# EAGLE board Arduino_Shield_3_4_19_REV2 (EAGLE 9.3.1)
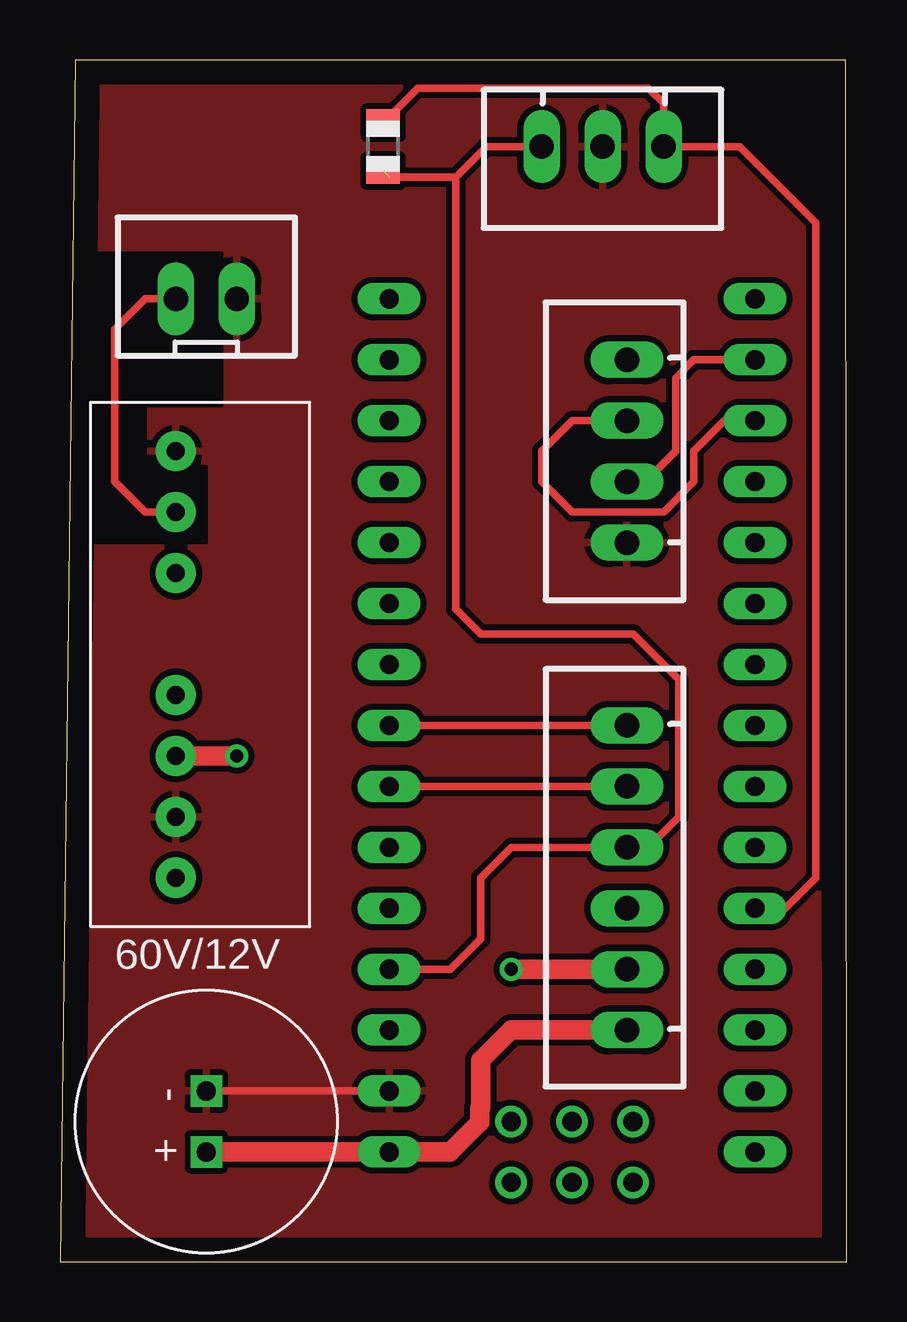
[diagram p0: board, top side]
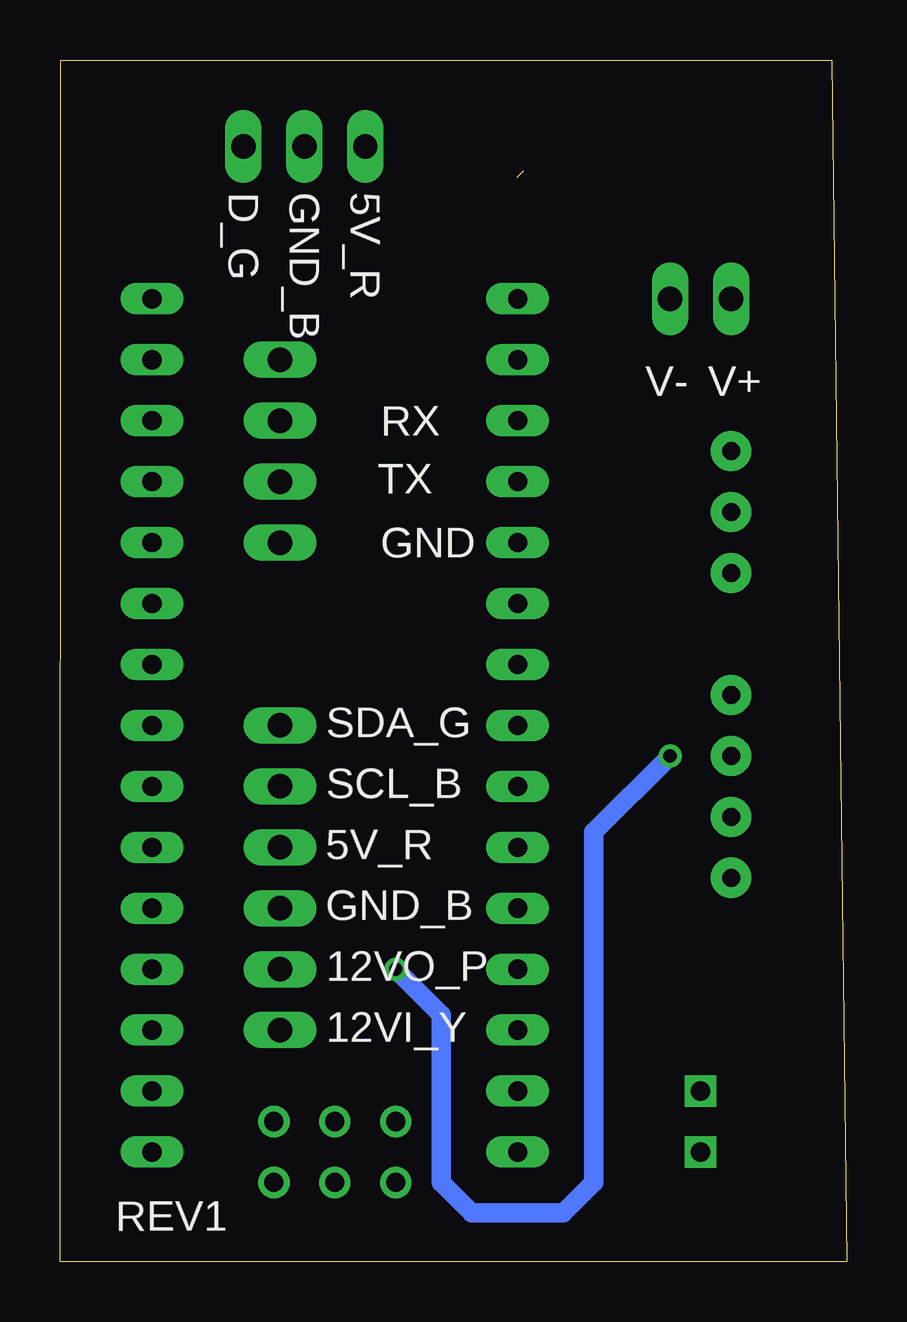
[diagram p1: board, bottom side, seen from below]

Size 32.79 x 50.09 mm. Coordinates in mm from the lower left corner, seen from the top.
Outline: 0,0 32.79,0 32.75,50.09 0.63,50.09 0,0
Copper layers (1*16): Top 0.035mm / dielectric 1.5mm / Bottom 0.035mm
Design rules "default": minimum track width 6mil, minimum drill 0.35mm, track to track 6mil, track to pad 6mil, pad to pad 6mil, via to via 6mil, smd to smd 6mil, copper to edge 40mil, drill to drill 6mil, minimum pad ring 10mil, minimum via ring 8mil, stop-mask expansion 4mil, vias tented up to drill 0mil, thermal gap 10mil
Net classes: 0 default: width 0.305 mm, clearance 0.254 mm; 1 POWER: width 0.762 mm, clearance 0.762 mm

## Footprints (pad centres in the part's own frame; a part is rotated, then mirrored left to right if it is on the bottom)
R0805 = smd 1.1 x 1.4: 1 -1,0; 2 1,0
NANO = drill 0.8 long: 3.3V -10.16,24.13; 5V -10.16,-1.27; A0 -10.16,19.05; A1 -10.16,16.51; A2 -10.16,13.97; A3 -10.16,11.43; A4 -10.16,8.89; A5 -10.16,6.35; A6 -10.16,3.81; A7 -10.16,1.27; AREF -10.16,21.59; D2 5.08,1.27; D3 5.08,3.81; D4 5.08,6.35; D5 5.08,8.89; D6 5.08,11.43; D7 5.08,13.97; D8 5.08,16.51; D9 5.08,19.05; D10 5.08,21.59; D11 5.08,24.13; D12 5.08,26.67; D13 -10.16,26.67; GND -10.16,-6.35; GND1 5.08,-1.27; RAW -10.16,-8.89; RST -10.16,-3.81; RST1 5.08,-3.81; RX1 5.08,-6.35; TX0 5.08,-8.89 | drill 0.8: ICSP1 -5.08,-10.16; ICSP2 -5.08,-7.62; ICSP3 -2.54,-10.16; ICSP4 -2.54,-7.62; ICSP5 0,-10.16; ICSP6 0,-7.62
SPBW06G-12 = drill 0.75 pad 1.676: +V_IN 2.54,0; +V_OUT 12.7,0; -V_IN 0,0; -V_OUT 15.24,0; N.C 10.16,0; N.C@8 17.78,0; R.C 5.08,0
THROUGHHOLE_CAP = drill 0.8 square: + 0,0; - 2.54,0
JST-XH-04-PACKAGE-LONG-PAD = drill 1.016 long: 1 -3.81,0; 2 -1.27,0; 3 1.27,0; 4 3.81,0
JST-XH-06-PACKAGE-LONG-PAD = drill 1.016 long: 1 -6.35,0; 2 -3.81,0; 3 -1.27,0; 4 1.27,0; 5 3.81,0; 6 6.35,0
JST-XH-02-PACKAGE-LONG-PAD = drill 1.016 long: 1 -1.27,0; 2 1.27,0
JST-XH-03-PACKAGE-LONG-PAD = drill 1.016 long: 1 -2.54,0; 2 0,0; 3 2.54,0

## Placement (x,y rotation side)
R1  10k  [R0805]  13.46,46.48 270 top
U$1  NANO  [NANO]  23.88,13.46 0 top
U$2  SPBW06G-12  [SPBW06G-12]  4.83,33.78 270 top
U$3  THROUGHHOLE_CAP  [THROUGHHOLE_CAP]  6.1,4.57 90 top
X1  JST_XH_04  [JST-XH-04-PACKAGE-LONG-PAD]  23.62,33.78 90 top
X2  JST_XH_06  [JST-XH-06-PACKAGE-LONG-PAD]  23.62,16 90 top
X4  JST_XH_02  [JST-XH-02-PACKAGE-LONG-PAD]  6.1,40.13 0 top
X5  JST_XH_03  [JST-XH-03-PACKAGE-LONG-PAD]  22.61,46.48 180 top

## Library data of the parts
R1 = adafruit
U$1 = Arduino-clone
U$2 U$3 = Bryan's_Library
X1 X2 X4 X5 = Rembrandt Electronics - JST XH Connectors v1-0

## Nets
5V_VCC_RED: R1.2 U$1.5V X2.4 X5.3
12V_IN_YELLOW: U$1.RAW U$3.+ X2.1
12V_OUT_PURPLE: U$2.+V_OUT X2.2
GND: U$1.GND U$2.-V_IN U$2.-V_OUT U$3.- X1.1 X4.2 X5.2
GND_BLACK: X2.3
LCD_SCL_BLUE: U$1.A5 X2.5
LCD_SDA_GREEN: U$1.A4 X2.6
N$4: R1.1 U$1.D2 X5.1
N.C: X1.4
RX: U$1.D10 X1.3
TX: U$1.D11 X1.2
V_BAT: U$2.+V_IN X4.1

## Tracks (layer width: path | path; a pad name or v marks a point on that pad's centre or on a via)
5V_VCC_RED  (1 unrouted)
  Top 0.305: U$1.5V 16.26,12.19 17.53,13.46 17.53,16 18.8,17.27 X2.4 24.51,17.27 25.78,18.54 25.78,24.26 23.88,26.16 17.53,26.16 16.49,27.19 16.49,45.21 | 16.49,45.21 13.73,45.21 | 16.49,45.21 17.76,46.48 X5.3
12V_IN_YELLOW
  Top 0.305: 17.53,5.84 16.26,4.57
  Top 0.813: X2.1 18.8,9.65 17.53,8.38 17.53,6.43 17.48,6.39 17.48,5.8 16.26,4.57 U$1.RAW U$3.+
12V_OUT_PURPLE  (via drill 0.55)
  Top 0.813: U$2.+V_OUT v7.37,21.08 | v18.8,12.19 X2.2
  Bottom 0.813: v7.37,21.08 10.54,17.91 10.54,3.3 11.81,2.03 15.62,2.03 16.89,3.3 16.89,10.29 v18.8,12.19
GND
  Top 0.305: U$3.- U$1.GND
  pour Top (rank 2): -0.25,-0.51 32.77,-0.51 32.77,50.29 -0.25,50.29
ISO
  cutout Top (isolate 0.508): 1.02,42.04 6.73,42.04 6.73,35.69 3.56,35.69 3.56,33.15 6.1,33.15 6.1,29.97 1.02,29.97
LCD_SCL_BLUE
  Top 0.305: U$1.A5 X2.5
LCD_SDA_GREEN
  Top 0.305: U$1.A4 X2.6
N$4
  Top 0.305: U$1.D2 30.23,14.73 31.5,16 31.5,43.31 28.32,46.48 X5.1 25.15,48.29 24.51,48.92 14.99,48.92 14.9,48.92 R1.1
RX
  Top 0.305: U$1.D10 27.69,35.05 26.42,33.78 26.42,32.51 25.15,31.24 21.34,31.24 20.07,32.51 20.07,33.78 21.34,35.05 X1.3
TX
  Top 0.305: U$1.D11 26.42,37.59 25.65,36.83 25.65,33.78 24.38,32.51 X1.2
V_BAT
  Top 0.305: X4.1 3.56,40.13 2.29,38.86 2.29,32.51 3.56,31.24 U$2.+V_IN

## Text on the board
bNames: 5V_R | GND_B | D_G | +V | -V | RX | TX | GND | SDA_G | SCL_B | 5V_R | GND_B | 12VO_P | 12VI_Y | REV1